# Altium PCB czad.PcbDoc
Units mm, origin at the board's own origin, x right, y up, seen from the top; angles counter-clockwise.
Board outline 40 x 25 mm, 2 copper layers (Top Layer, Bottom Layer); 20 components, 11 nets, 45 pads, 3 vias.
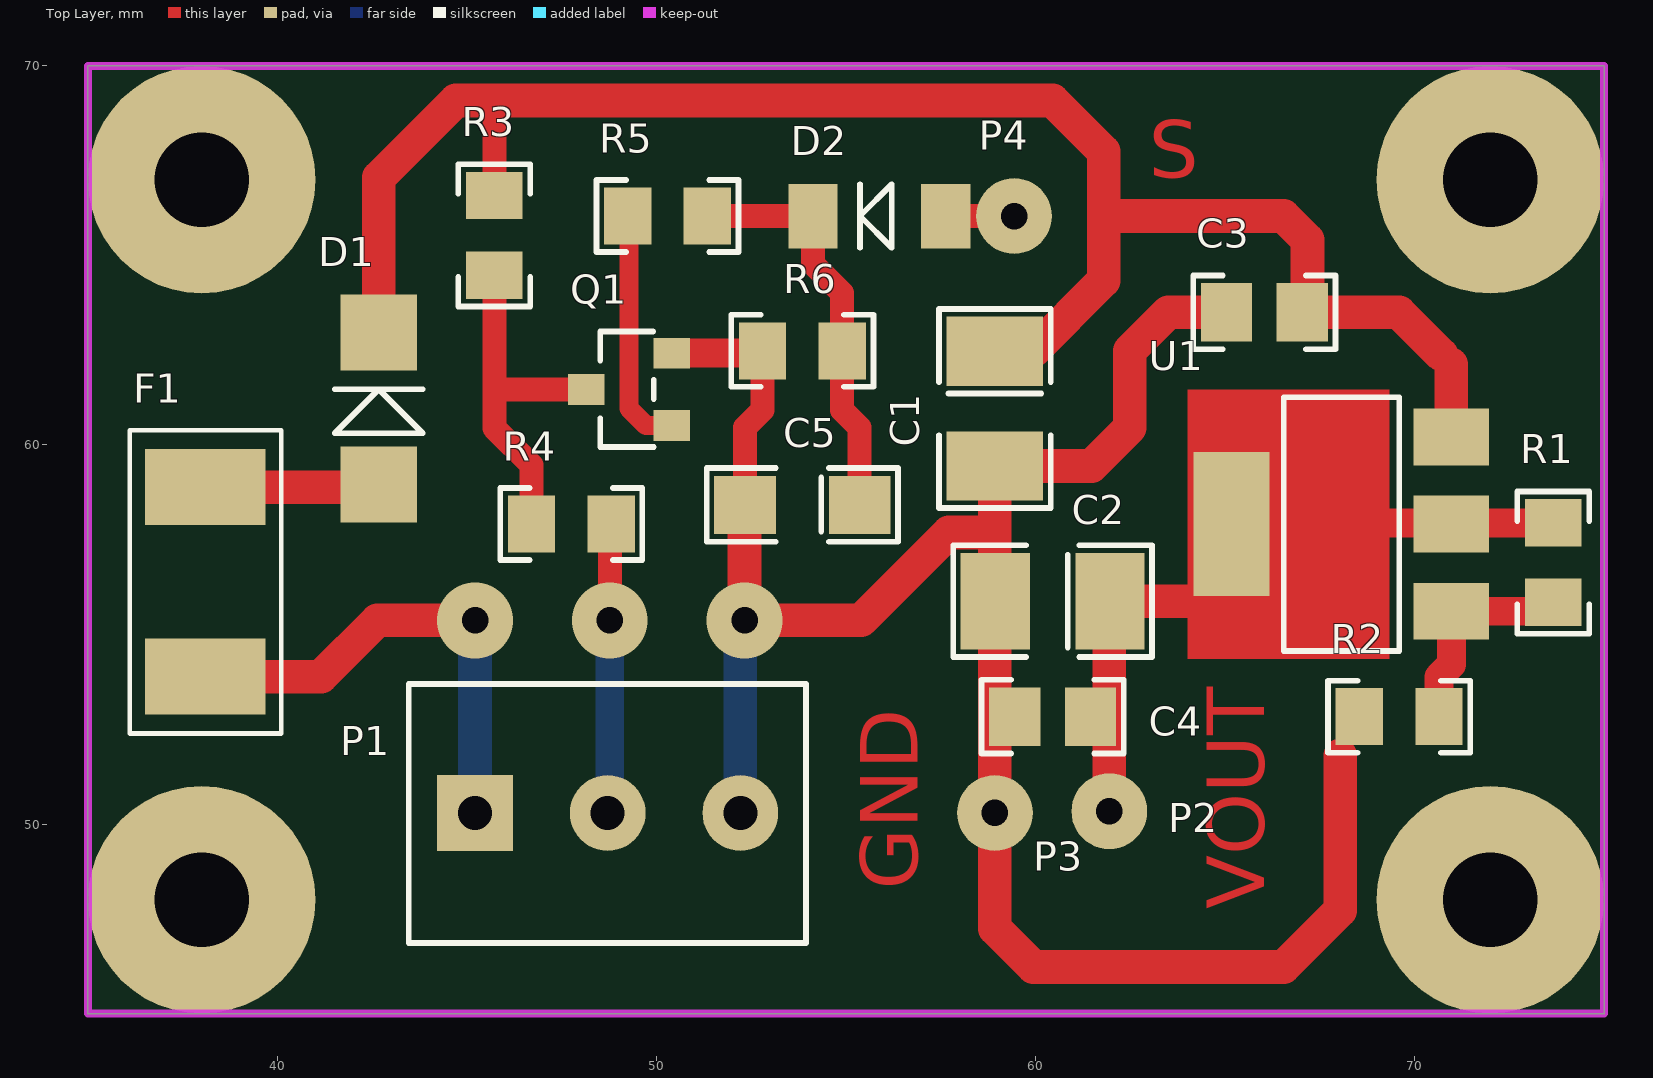
[diagram p0: Top Layer view]
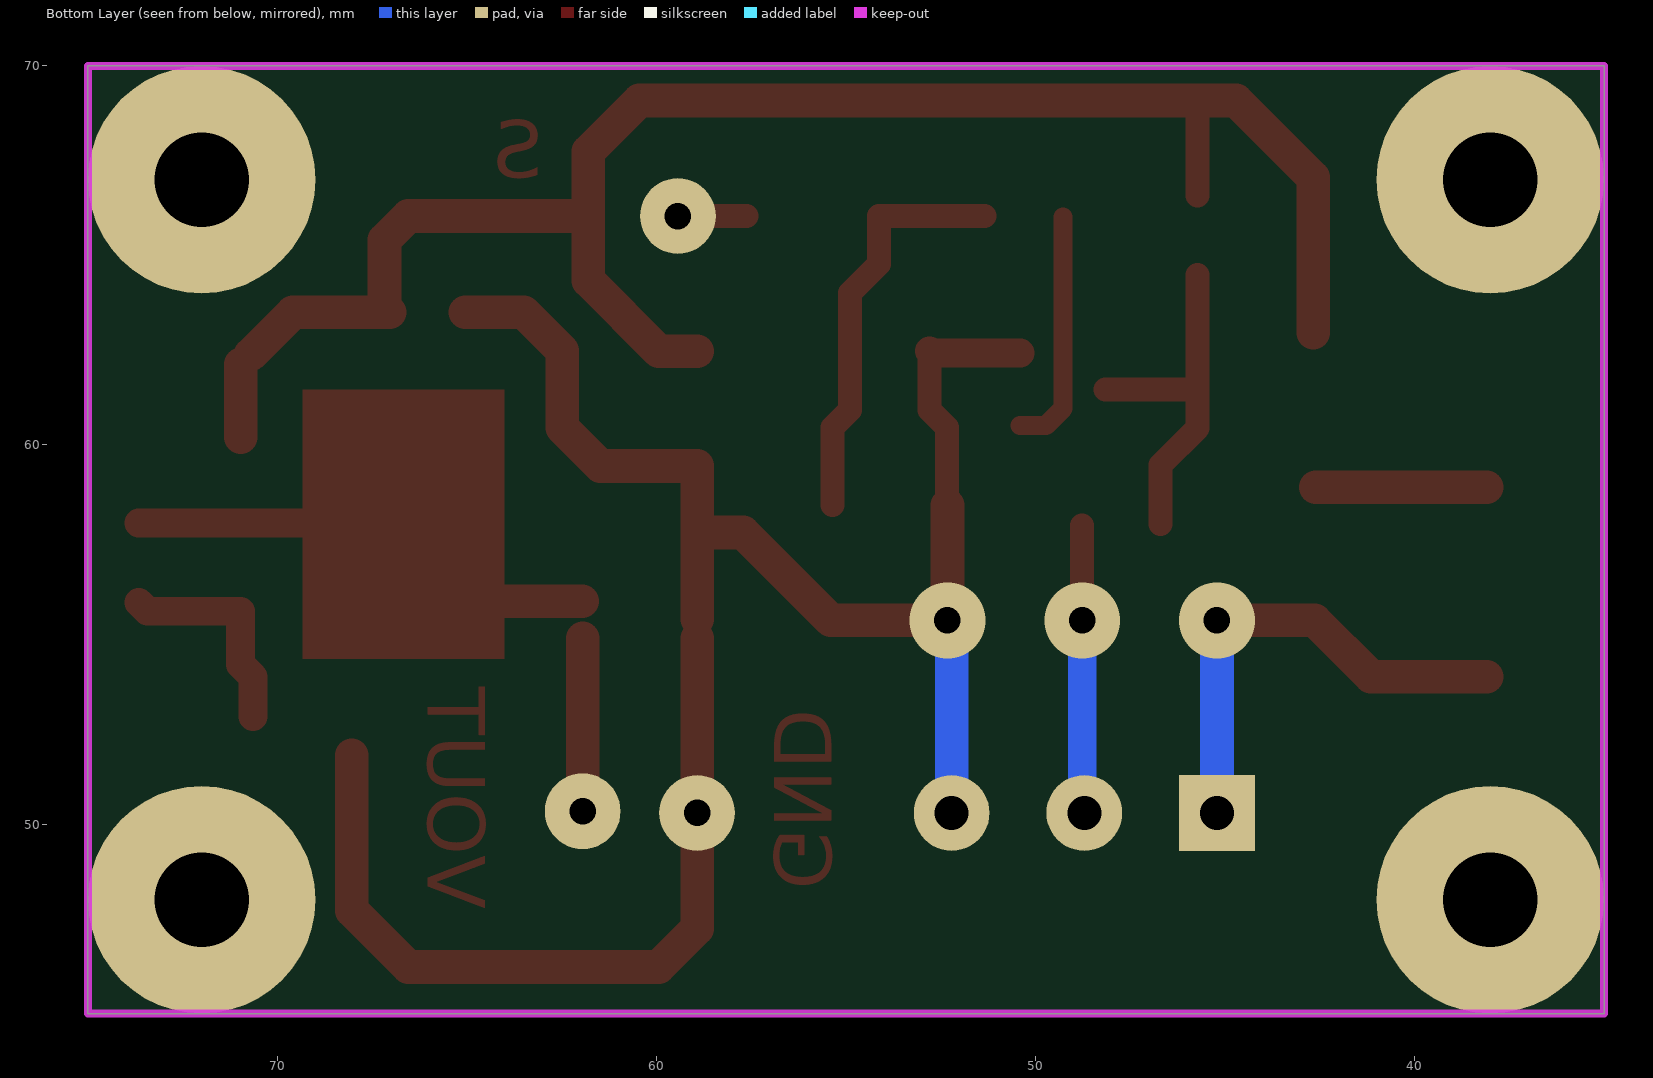
[diagram p1: Bottom Layer view, seen from below]

## Layer stack, top to bottom
Top Layer: signal copper 0.0356
Dielectric: dielectric 0.32, FR-4, Dk 4.8
Bottom Layer: signal copper 0.0356

## Board outline
35,45 75,45 75,70 35,70

## Design rules (kind name [scope] priority, off if disabled: settings)
Clearance [All] p1: gap=0.254
PolygonConnect [All] p1: connectstyle=Relief reliefconductorwidth=0.254 reliefentries=4 polygonreliefangle="90 Angle" airgapwidth=0.254
RoutingVias [All] p1: holewidth=0.7 width=2 viastyle="Through Hole" minholewidth=0.7 minwidth=2 maxholewidth=0.7 maxwidth=2
SolderMaskExpansion [All] p1: expansion=0.102
Width [All] p1: maxlimit=1.27 minlimit=0.508 preferedwidth=0.762 minimp=50.000000 maximp=50.000000 favimp=50.000000
28 further rules are at their usual default settings.

## Components (designator, comment, footprint, x,y, rotation, side; value= is the part's Value field where it differs from the comment)
C1 "10uF" TANC_B 58.928,60.96 r270 top
C2 "10uF" TANC_B 60.452,55.88 r180 top
C3 "100nF" C0805 66.04,63.5 r180 top
C4 "100nF" C0805 60.452,52.832 r180 top
C5 "1uF" TANC_A 53.848,58.42 r180 top
D1 "M4" SMA 42.672,60.96 r270 top
D2 "1N4148" DO-213A 55.88,66.04 r0 top
F1 "0679-0500-01" 0679-0500-01 38.1,56.388 r90 top
P1 "ARK 3-Pin" ARK-3.5mm-3pin 45.212,50.292 r0 top
P2 "2.5V" PAD 61.948,50.336 r0 top
P3 "GND" PAD 58.928,50.292 r0 top
P4 "SIG" PAD 59.436,66.04 r0 top
Q1 "2N7002" SOT23 49.276,61.468 r90 top
R1 "120R" R0805 73.66,56.896 r270 top
R2 "120R" R0805 69.596,52.832 r180 top
R3 "10K" R0805 45.72,65.532 r270 top
R4 "100R" R0805 47.752,57.912 r180 top
R5 "100R" R0805 50.292,66.04 r0 top
R6 "1M" R0805 53.848,62.484 r0 top
U1 "LD1117S-TR" SOT-223 68.072,57.912 r0 top

## Footprints (in the part's own frame and the unit in brackets; to place one, negate y for a bottom-side part, rotate by r counter-clockwise, add the part's x,y. Pads: shape width x height; smd on the part's side, far side on the other; paste and mask are expansions set on the pad)
0679-0500-01 [mm]
  rect 2x3.18 smd: 1(-2.5,0) 2(2.5,0)
  silkscreen extent -4,-2 4,2, body extent -3.05,-1.3 3.05,1.39, height 2.69
ARK-3.5mm-3pin [mm]
  rect 2x2 hole 0.9: 1(0,0)
  round 2 hole 0.9: 2(3.5,0) 3(7,0)
  silkscreen extent -1.75,-3.43 8.73,3.4, body extent -1.76,-3.43 8.74,3.47, height 2.1
C0805 [mm] "Chip Capacitor, Body 2.0x1.2mm, Height 1.3mm, IPC Low Density"
  rect 1.35x1.55 smd: 1(-1,0) 2(1,0)
  silkscreen extent -1.88,-0.97 1.88,0.97, body extent -1.1,-0.72 1.1,0.72, height 1.3
DO-213A [mm]
  rect 1.3x1.7 smd: 1(-1.75,0) 2(1.75,0)
  silkscreen extent -0.51,-0.84 0.33,0.84, body extent -1.75,-0.7 1.75,0.7, height 1.39
PAD [mm]
  round 2 hole 0.7: 1(0,0)
R0805 [mm] "Chip Resistor, Body 2.0x1.3mm, IPC Low Density"
  rect 1.25x1.5 smd: 1(-1.05,0) 2(1.05,0)
  silkscreen extent -1.88,-0.95 1.88,0.95, body extent -1.1,-0.67 1.1,0.67, height 0.7
SMA [mil]
  rect 79x79 smd: 1(-78.87,0) 2(78.87,0)
  silkscreen extent -20,-46 26,46, body extent -98,-53 98,53, height 87
SOT23 [mil]
  rect 32x38 smd: 1(-37.6,-44.33) 2(37.6,-44.33) 3(0,44.33)
  silkscreen extent -60,-26 60,30, body extent -57,-49 57,48, height 40
SOT-223 [mm]
  rect 2x1.5 smd: 1(2.9,-2.3) 2(2.9,0) 3(2.9,2.3)
  rect 2x3.8 smd: 2(-2.9,0)
  silkscreen extent -1.52,-3.35 1.52,3.35, body extent -3.5,-3.25 3.5,3.25, height 1.69
TANC_A [mil]
  rect 64x60 smd: 1(-59.53,0) 2(59.53,0)
  silkscreen extent -99,-38 99,38, body extent -64,-31 64,31, height 63
TANC_B [mil]
  rect 72x100 smd: 1(-59.53,0) 2(59.53,0)
  silkscreen extent -103,-58 103,58, body extent -69,-55 70,55, height 75

## Part data
C1 C2 C5: library part Cap_Pol, "Capacitor Polarized"
C3 C4: library part Cap, "Capacitor"
D1 D2: library part Diode
F1: "Bezpiecznik: topikowy; szybki; ceramiczny; 500mA; 125VAC; 125VDC"
P2 P3 P4: library part PAD, "PAD"
Q1: library part 2N7002(GSD), "N-MOSFET"
R1 R2 R3 R4 R5 R6: library part Res, "Resistor"
U1: "Stabilizator napiêcia; LDO, liniowy, regulowany; 1,25÷15V; 0,95A"

## Free pads (board coordinates)
  round 6 hole 2.5: M(38,48) M(38,67) M(72,48) M(72,67)

## Via types
v1: diameter 2, hole 0.7, Top Layer to Bottom Layer, 3 vias

## Nets (pads, with @x,y where several pads share a name; then routed paths per layer and width w, separated by ;. In a path a pad name is that pad's centre, name@x,y a point inside that pad or via, vN(x,y) a via of type N, cw(c..) or ccw(c..) an arc to the next point about the centre after c; other vN are vias at no path point)
2.5V: C2.1 C4.1 P2.1 R1.1 U1.2 | length 16.1
  Top Layer w0.762: U1.2@65.172,57.912 65.206,57.946 R1.1
  Top Layer w0.889: P2.1 C2.1@61.948,54.896 ; C2.1 65.024,55.88
12V: C1.1 C3.1 D1.1 R3.1 U1.3 | length 47.8
  Top Layer w0.635: R3.1 45.72,69.088
  Top Layer w0.889: D1.1 42.672,67.056 44.704,69.088 45.72,69.088 60.452,69.088 61.797,67.743 61.797,66.04 ; C1.1 59.932,62.472 61.797,64.337 61.797,66.04 ; C3.1 C3.1@67.176,63.5 ; 70.718,62.378 69.596,63.5 C3.1@67.176,63.5 ; U1.3 70.972,62.124 ; 61.797,66.04 66.548,66.04 67.176,65.412 C3.1@67.176,63.5
GND: C1.2 C2.2 C3.2 C4.2 C5.2 P1.3 P3.1 Q1.2 R2.2 R6.1 | length 57.2
  Top Layer w0.635: C5.2 52.336,60.464 52.798,60.926 R6.1
  Top Layer w0.762: Q1.2 52.737,62.423 R6.1 ; C5.2@52.324,58.408 C5.2 ; C1.2@58.924,59.448 C1.2
  Top Layer w0.889: C5.2@52.324,58.408 v1(52.324,55.372) 55.396,55.372 57.714,57.69 58.924,57.69 ; P3.1@58.924,50.296 C2.2@58.924,54.896 ; C2.2@58.924,55.404 58.924,57.69 ; C1.2@58.924,59.448 58.924,57.69 ; P3.1 58.928,47.244 59.944,46.228 66.548,46.228 68.038,47.718 68.038,51.816 ; C1.2 61.48,59.448 62.484,60.452 62.484,62.484 63.5,63.5 C3.2
  Bottom Layer w0.889: P1.3 v1@52.212,55.26
NetC5_1: C5.1 D2.1 R5.2 R6.2 | length 10.9
  Top Layer w0.635: R5.2 D2.1 54.13,64.776 54.898,64.008 R6.2 54.898,60.926 55.36,60.464 C5.1
NetD1_2: D1.2 F1.2 | length 4.5
  Top Layer w0.889: F1.2 D1.2@42.603,58.888
NetD2_2: D2.2 P4.1 | length 2.3
  Top Layer w0.635: D2.2 P4.1@59.944,66.04
NetF1_1: F1.1 P1.1 | length 12.9
  Top Layer w0.889: F1.1 41.148,53.888 42.632,55.372 v1(45.212,55.372)
  Bottom Layer w0.889: P1.1 v1(45.212,55.372) v1@45.268,55.316
NetQ1_1: Q1.1 R5.1 | length 6.4
  Top Layer w0.508: R5.1@49.276,66.006 49.276,60.96 49.723,60.513 Q1.1
NetQ1_3: Q1.3 R3.2 R4.2 | length 9.4
  Top Layer w0.635: R3.2 45.72,60.452 46.702,59.47 R4.2 ; 45.737,61.468 Q1.3
NetR1_2: R1.2 R2.1 U1.1 | length 5.7
  Top Layer w0.762: R2.1 70.646,53.882 70.972,54.208 U1.1 73.426,55.612 R1.2
OUT: P1.2 R4.1 | length 7.6
  Top Layer w0.635: v1(48.768,55.372) R4.1@48.768,57.878
  Bottom Layer w0.762: P1.2@48.768,50.292 v1(48.768,55.372)

## Keep-outs
Keep-Out Layer:
  the board outline again, w0.2

## Other copper
Top Layer:
  region net 2.5V: 69.342,61.468 64.008,61.468 64.008,54.356 69.342,54.356
  text "S" at 62.992,67.056 h1.52
  text "GND" at 56.896,48.26 h1.52 r90
  text "VOUT" at 66.04,47.752 h1.52 r90

## Dimensions
75,45 to 75,70 on Keep-Out Layer
35,45 to 75,45 on Keep-Out Layer